# Altium PCB Soldering_Station.PcbDoc
Units mm, origin at the board's own origin, x right, y up, seen from the top; angles counter-clockwise.
Board outline 153.92 x 103.12 mm, 2 copper layers (Top Layer, Bottom Layer); 77 components, 76 nets, 294 pads, 68 vias.
Unrouted connection lines stored in the file: 1.
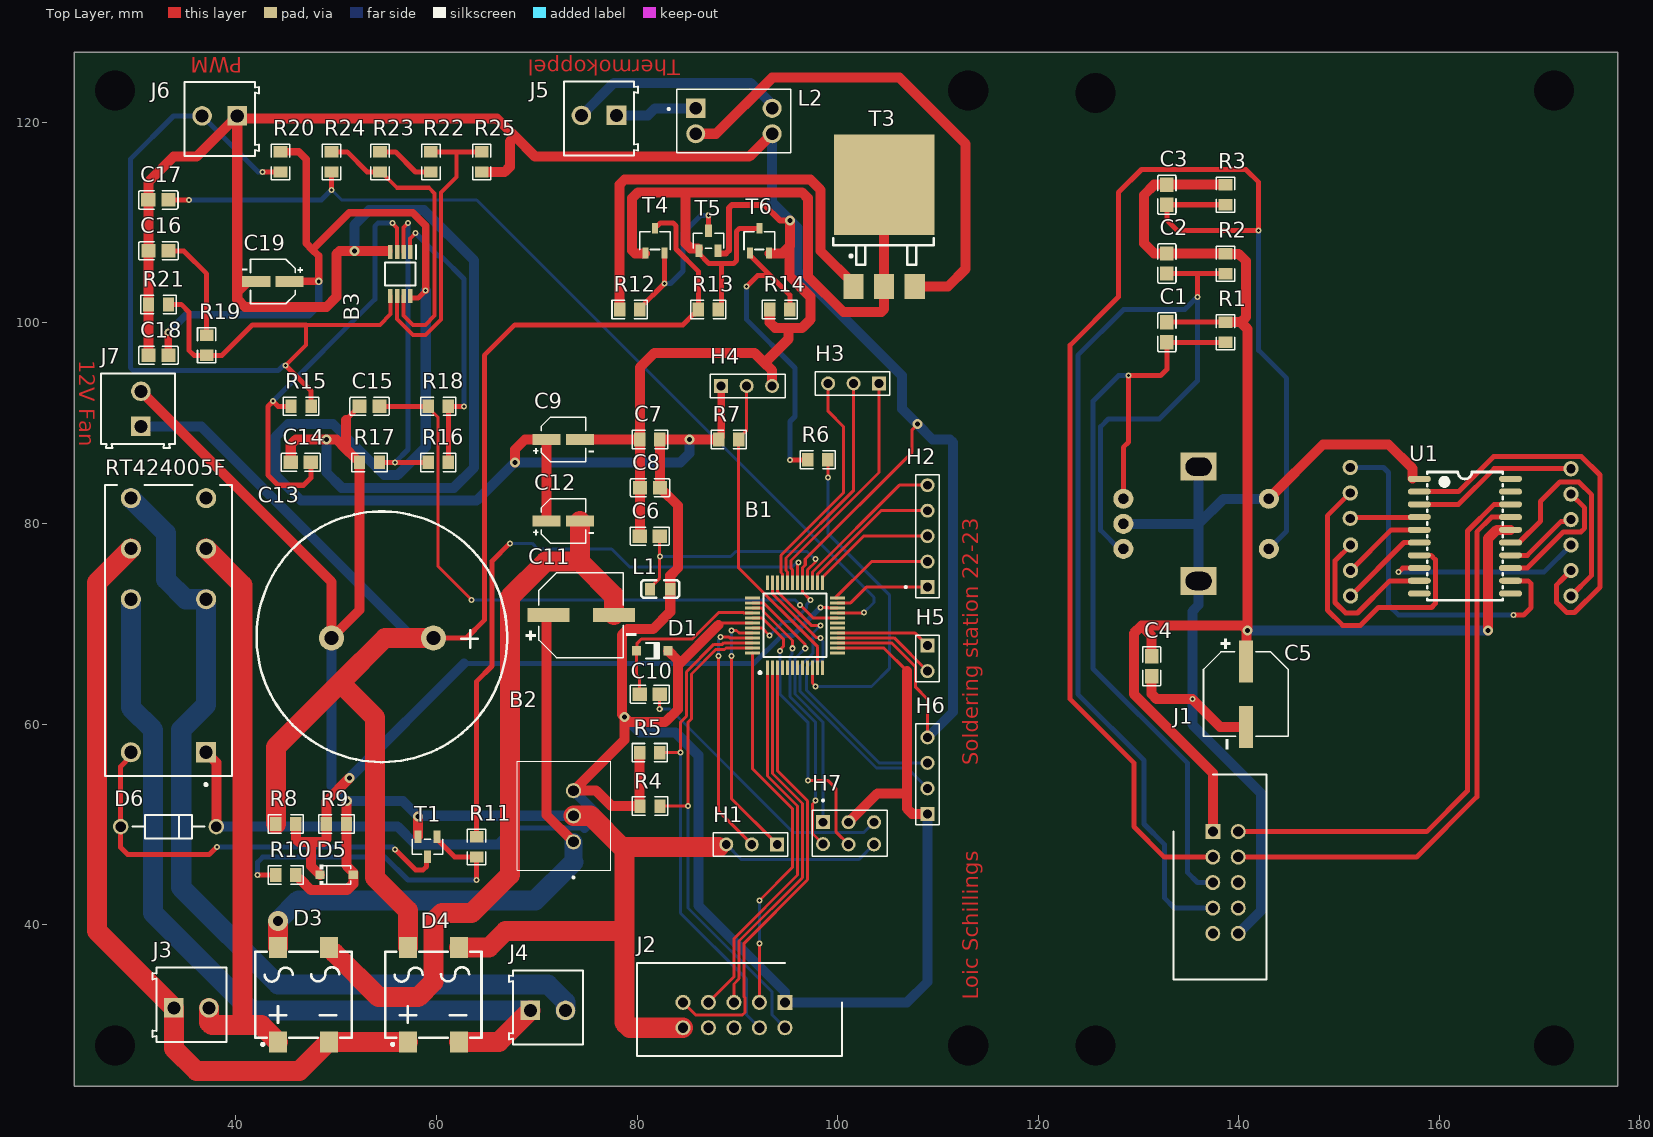
[diagram p0: Top Layer view]
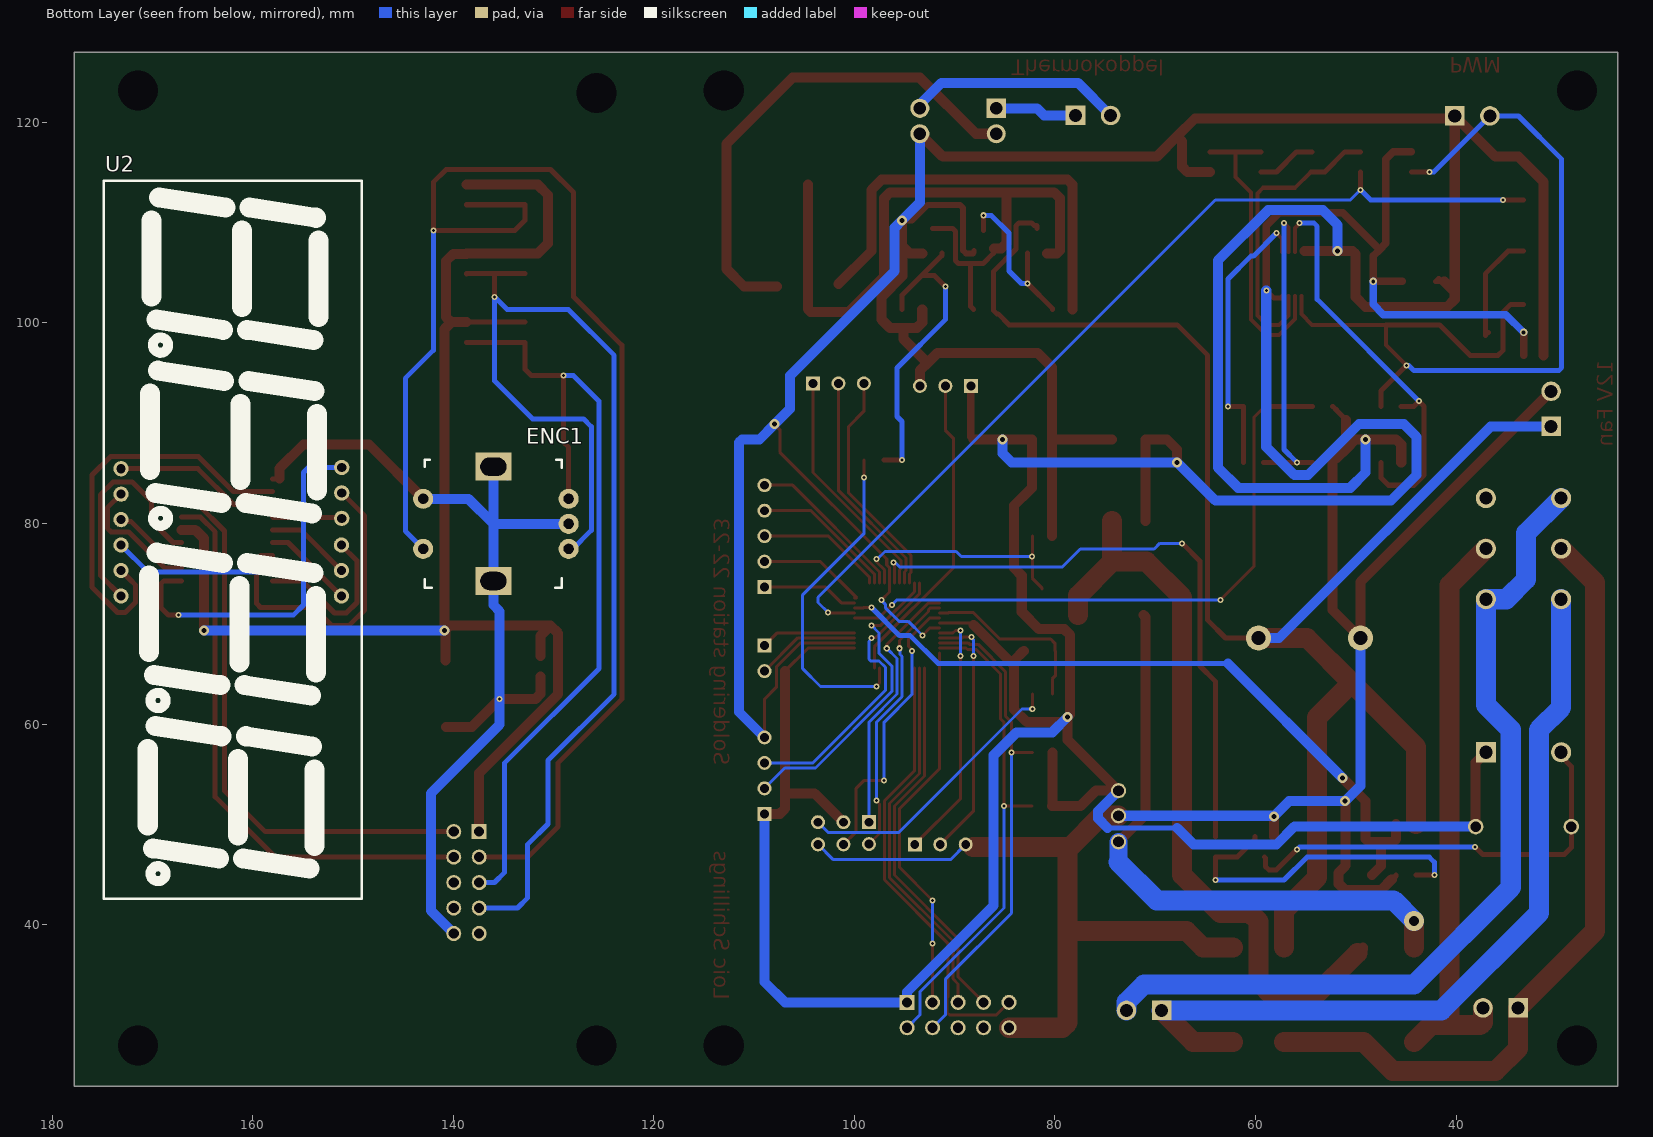
[diagram p1: Bottom Layer view, seen from below]

## Layer stack, top to bottom
Top Solder: solder mask 0.0102, Solder Resist, Dk 3.5
Top Layer: signal copper 0.0356
Dielectric 1: dielectric 0.32, FR-4, Dk 4.8
Bottom Layer: signal copper 0.0356
Bottom Solder: solder mask 0.0102, Solder Resist, Dk 3.5

## Board outline
23.876,23.876 177.8,23.876 177.8,127 23.876,127

## Design rules (kind name [scope] priority, off if disabled: settings)
Clearance [All] p1: gap=0.2 ignorepadtopadclearanceinfootprint=FALSE
HoleSize [All] p1: absolutevalues=TRUE maxlimit=5 minlimit=0.025 maxpercent=80.000 minpercent=20.000
MinimumSolderMaskSliver [All] p1: minsoldermaskwidth=0.25
PolygonConnect [All] p1: connectstyle=Relief reliefconductorwidth=0.254 reliefentries=4 polygonreliefangle="90 Angle" airgapwidth=0.254
RoutingVias [All] p1: holewidth=0.3 width=0.6 viastyle="Through Hole" minholewidth=0.3 minwidth=0.6 maxholewidth=1 maxwidth=2
SilkToSolderMaskClearance [IsPad] p1: minsilkscreentomaskgap=0.1 clearancetoexposedcopper=TRUE
SolderMaskExpansion [All] p1: expansion=0.102 istentingtop=FALSE
Width [All] p1: maxlimit=2 minlimit=0.3 preferedwidth=0.5
27 further rules are at their usual default settings.

## Classes and differential pairs
component class Voeding: B2 C12 C13 D3 D4 D5 D6 J3 J4 "Projects  Projects  Projects  Projects" R8 R9 R10 R11 T1
component class Thermokoppel: J5 L2 R12 R13 R14 T3 T4 T5 T6
component class PWM: B3 C14 C15 C16 C17 C18 C19 J6 R15 R16 R17 R18 R19 R20 R21 R22 R23 R24 R25
component class Display: C1 C2 C3 C4 ENC1 J1 R1 R2 R3 U1 U2
component class CPU: B1 C6 C7 C8 C9 C10 D1 H1 H2 H3 H4 H5 H6 H7 J2 L1 R4 R5 R6 R7

## Components (designator, comment, footprint, x,y, rotation, side; value= is the part's Value field where it differs from the comment)
B1 "ATMEGA4809-AU" ATMEGA4809-AU 95.758,69.85 r90 top
B2 "OKI-78SR-5_1.5-W36-C" OKI78SR515W36C 73.66,48.26 r90 top
B3 "MCP6002-E_MS" MCP6002-E_MS 56.388,104.902 r270 top
C1 "10nF" 10NF 132.842,99.076 r90 top
C2 "10nF" 10NF 132.842,105.934 r90 top
C3 "10nF" 10NF 132.842,112.792 r90 top
C4 "100nF" 10NF 131.318,65.77 r270 top
C5 "100uF" "100uF 50V" 140.716,62.992 r270 top
C6 "100nF" 10NF 81.264,78.74 r0 top
C7 "100nF" R0805 81.28,88.392 r0 top
C8 "100nF" 10NF 81.296,83.566 r0 top
C9 "10uF" 10UF 72.644,88.392 r0 top
C10 "100nF" 10NF 81.264,62.992 r180 top
C11 "100uF" "100uF 50V" 74.422,70.866 r0 top
C12 "10µF" 10UF 72.644,80.264 r0 top
C13 "4700µF" 4700UF 54.61,68.58 r180 top
C14 "10nF" 10NF 46.466,86.106 r0 top
C15 "10nF" 10NF 53.324,91.694 r0 top
C16 "10nF" 10NF 32.274,107.188 r0 top
C17 "10nF" 10NF 32.258,112.268 r0 top
C18 "100nF" 10NF 32.274,96.774 r0 top
C19 "10uF" 10UF 43.688,104.14 r180 top
D1 "1N4148W-7-F" 1N4148W 81.534,67.31 r0 top
D3 "TTR8MF" TTR8MF 46.736,33.02 r0 top
D4 "TTR8MF" TTR8MF 59.69,33.02 r0 top
D5 "BZT52C5V1_C353516" BZT52C5V1_C353516 50.038,44.958 r0 top
D6 "1N4007" "1N4007 THT" 33.274,49.784 r180 top
ENC1 "PEC11R-4220F-S0012" PEC11R-4220F-S0012 135.752,79.969 r90 bottom
H1 "3 Pin Header" "3 PIN HEADER" 88.9,48.006 r180 top
H2 "5 Pin Header" "5 PIN HEADER" 108.966,78.74 r90 top
H3 "3 Pin Header" "3 PIN HEADER" 99.06,93.98 r180 top
H4 "3 Pin Header" "3 PIN HEADER" 93.472,93.726 r0 top
H5 "Pin Header" "2 PIN HEADER" 113.132,61.087 r270 top
H6 "4 Pin Header" "4 PIN HEADER" 108.966,56.134 r90 top
H7 "6 Pin Header" "6 PIN HEADER" 103.632,50.216 r0 top
J1 "5104338-1" "10 PIN BOXHEADER" 137.414,49.276 r90 top
J2 "5104338-1" "10 PIN BOXHEADER" 94.742,32.258 r0 top
J3 "691214110002" "2 SCREW TERMINAL WE 691214110002" 35.56,32.004 r0 top
J4 "691214110002" "2 SCREW TERMINAL WE 691214110002" 71.12,31.75 r0 top
J5 "691214110002" "2 SCREW TERMINAL WE 691214110002" 76.2,120.396 r180 top
J6 "691214110002" "2 SCREW TERMINAL WE 691214110002" 38.382,120.35 r180 top
J7 "691214110002" "2 Screw Terminal WE 691214110002" 30.226,91.44 r90 top
L1 "10uH" "10UH INDUCT SMD" 82.312,73.469 r0 top
L2 "CM2545X171B-10" CM2545X171B-10 89.662,120.142 r0 top
R1 "10kΩ" R0805 138.684,99.076 r90 top
R2 "10kΩ" R0805 138.684,105.902 r90 top
R3 "10kΩ" R0805 138.684,112.792 r90 top
R4 "4k7" R0805 81.296,51.816 r180 top
R5 "4k7" R0805 81.264,57.15 r180 top
R6 "10k" R0805 98.028,86.36 r180 top
R7 "4k7" R0805 89.138,88.392 r0 top
R8 "68k" R0805 44.974,50.038 r180 top
R9 "10k" R0805 50.022,50.038 r0 top
R10 "4k7" R0805 44.974,44.958 r0 top
R11 "10k" R0805 64.008,47.752 r270 top
R12 "100" R0805 79.264,101.346 r0 top
R13 "4k7" R0805 87.106,101.346 r180 top
R14 "4k7" R0805 94.234,101.346 r0 top
R15 "5k6" R0805 46.498,91.694 r0 top
R16 "18k" R0805 60.182,86.106 r180 top
R17 "100" R0805 53.324,86.106 r0 top
R18 "5k6" R0805 60.182,91.694 r0 top
R19 "5k6" R0805 37.084,97.774 r270 top
R20 "1M" R0805 44.45,116.062 r90 top
R21 "10M" R0805 32.274,101.854 r0 top
R22 "18k" R0805 59.436,116.062 r90 top
R23 "18k" R0805 54.356,116.062 r90 top
R24 "5k6" R0805 49.53,116.062 r90 top
R25 "100" R0805 64.516,116.062 r90 top
RT424005F "RT424005" "RT424005-MFG Power Relay" 33.274,69.342 r90 top (schematic designator "Projects  Projects  Projects  Projects")
T1 "BC547" BC847C_NPN 59.116,47.768 r90 top
T3 "IRF9Z34NSPBF" IRF9Z34NSPBF 104.569,110.587 r0 top
T4 "BC847C_C3027113" BC847_PNP 81.788,108.204 r270 top
T5 "BC857 3G" BC847C_NPN 87.122,108.204 r270 top
T6 "BC847C_C3027113" BC847_PNP 92.202,108.204 r270 top
U1 "TM1637(TA2007)" TM1637(TA2007) 162.56,78.74 r270 top
U2 "ATA8041AB" ? 176.399,53.719 r270 bottom

## Footprints (in the part's own frame and the unit in brackets; to place one, negate y for a bottom-side part, rotate by r counter-clockwise, add the part's x,y. Pads: shape width x height; smd on the part's side, far side on the other; paste and mask are expansions set on the pad)
"1N4007 THT" [mm] "AXIAL, 2-Leads, Diameter 2.35mm"
  round 1.55 hole 1.05: 1(-4.77,0) 2(4.77,0)
  silkscreen extent -3.59,-1.17 3.59,1.17
1N4148W [mm] "SOD123, 2-Leads, Body 2.7x1.55mm, Height 1.45mm"
  rect 0.9x0.95 smd: 1(-1.575,0) 2(1.575,0)
  silkscreen extent -0.64,-0.82 0.64,0.77, body extent -1.35,-0.77 1.35,0.77, height 1.45
"2 PIN HEADER" [mil]
  rect 55x55 hole 35: 1(-265,-164)
  round 55 hole 35: 2(-165,-164)
  silkscreen extent -307,-210 -123,-118, body extent -313,-207 -116,-116, height 327
"2 SCREW TERMINAL WE 691214110002" [mm] "3.50 mm Horizontal Entry Modular, 2p"
  rect 1.95x1.95 hole 1.3: 1(-1.75,-0.3)
  round 1.95 hole 1.3: 2(1.75,-0.3)
  silkscreen extent -3.9,-3.7 3.5,3.7, body extent -3.95,-3.7 3.5,3.7, height 8.55
"2 Screw Terminal WE 691214110002" [mm] "3.50 mm Horizontal Entry Modular, 2p"
  rect 1.95x1.95 hole 1.3: 1(-1.75,-0.3)
  round 1.95 hole 1.3: 2(1.75,-0.3)
  silkscreen extent -3.9,-3.7 3.5,3.7, body extent -3.95,-3.7 3.5,3.7, height 8.55
"3 PIN HEADER" [mil]
  rect 55x55 hole 35: 1(-200,0)
  round 55 hole 35: 2(-100,0) 3(0,0)
  silkscreen extent -242,-46 51,46, body extent -242,-45 53,46, height 327
"4 PIN HEADER" [mil]
  rect 55x55 hole 35: 1(-200,0)
  round 55 hole 35: 2(-100,0) 3(0,0) 4(100,0)
  silkscreen extent -242,-46 154,46, body extent -241,-45 153,46, height 327
"5 PIN HEADER" [mil]
  rect 55x55 hole 35: 1(-200,0)
  round 55 hole 35: 2(-100,0) 3(0,0) 4(100,0) 5(200,0)
  silkscreen extent -242,-46 242,89, body extent -246,-45 246,46, height 327
"6 PIN HEADER" [mil]
  rect 55x55 hole 35: 1(-200,0)
  round 55 hole 35: 2(-100,0) 3(0,0) 4(-200,-86) 5(-100,-87) 6(0,-87)
  silkscreen extent -242,-134 51,89, body extent -241,-139 54,50, height 354
"10 PIN BOXHEADER" [mm]
  rect 1.5x1.5 / inner round 1.5 / far side rect 1.5x1.5 hole 1: 1(0,0)
  round 1.5 hole 1: 2(0,-2.54) 3(-2.54,0) 4(-2.54,-2.54) 5(-5.08,0) 6(-5.08,-2.54) 7(-7.62,0) 8(-7.62,-2.54) 9(-10.16,0) 10(-10.16,-2.54)
  silkscreen extent -14.73,-5.33 5.71,3.94, body extent -10,-3.38 10,3.38, height 5.8
10NF [mm]
  rect 1.41x1.35 smd: 1(-1,0) 2(1,0)
  silkscreen extent -1.96,-0.9 1.96,0.9
10UF [mm]
  rect 2.8x1.1 smd: 1(-1.66,0) 2(1.66,0)
  silkscreen extent -2.99,-2.23 3.05,2.23
"10UH INDUCT SMD" [mm]
  rect 1x1.25 smd: 1(-1,0) 2(1,0)
  silkscreen extent -1.91,-0.89 1.91,0.89
"100uF 50V" [mm]
  rect 4.2x1.4 smd: 1(-3.267,0) 2(3.267,0)
  silkscreen extent -5.52,-4.23 5.48,4.23
4700UF [mm]
  round 2.5 hole 1.4: 1(-5.08,0) 2(5.08,0)
  silkscreen extent -12.44,-12.62 12.56,12.37
ATMEGA4809-AU [mm]
  rect 1.475x0.3 smd: 1(-4.238,2.75) 2(-4.238,2.25) 3(-4.238,1.75) 4(-4.238,1.25) 5(-4.238,0.75) 6(-4.238,0.25) 7(-4.238,-0.25) 8(-4.238,-0.75) 9(-4.238,-1.25) 10(-4.238,-1.75) 11(-4.238,-2.25) 12(-4.238,-2.75) 25(4.238,-2.75) 26(4.238,-2.25) 27(4.238,-1.75) 28(4.238,-1.25) 29(4.238,-0.75) 30(4.238,-0.25) 31(4.238,0.25) 32(4.238,0.75) 33(4.238,1.25) 34(4.238,1.75) 35(4.238,2.25) 36(4.238,2.75)
  rect 0.3x1.475 smd: 13(-2.75,-4.238) 14(-2.25,-4.238) 15(-1.75,-4.238) 16(-1.25,-4.238) 17(-0.75,-4.238) 18(-0.25,-4.238) 19(0.25,-4.238) 20(0.75,-4.238) 21(1.25,-4.238) 22(1.75,-4.238) 23(2.25,-4.238) 24(2.75,-4.238) 37(2.75,4.238) 38(2.25,4.238) 39(1.75,4.238) 40(1.25,4.238) 41(0.75,4.238) 42(0.25,4.238) 43(-0.25,4.238) 44(-0.75,4.238) 45(-1.25,4.238) 46(-1.75,4.238) 47(-2.25,4.238) 48(-2.75,4.238)
  silkscreen extent -4.85,-3.15 3.15,3.62, body extent -9.98,-3.38 10.02,3.38, height 5.8
BC847_PNP [mm]
  rect 1.07x0.6 smd: 1(1.235,-0.95) 2(1.235,0.95) 3(-1.235,0)
  silkscreen extent -0.88,-1.54 0.88,1.54
BC847C_NPN [mm]
  rect 1.25x0.7 smd: 1(1,-0.95) 2(1,0.95) 3(-1,0)
  silkscreen extent -0.73,-1.53 0.74,1.53
BZT52C5V1_C353516 [mm]
  rect 0.91x0.84 smd: 1(-1.655,0) 2(1.655,0)
  silkscreen extent -1.65,-1 1.43,1
CM2545X171B-10 [mm]
  rect 1.905x1.905 hole 1.27: 1(-3.81,1.27)
  round 1.905 hole 1.27: 2(-3.81,-1.27) 3(3.81,-1.27) 4(3.81,1.27)
  silkscreen extent -6.6,-3.15 5.69,3.15, body extent -5.69,-3.15 5.69,3.15, height 9.5
IRF9Z34NSPBF [mm]
  rect 2x2.5 smd: 1(-2.969,-6.955) 2(0.079,-6.955) 3(3.127,-6.955)
  rect 10x10 smd: 2(0.079,3.205)
  silkscreen extent -5,-4.79 5,-2.13
MCP6002-E_MS [mm]
  rect 1.4x0.45 smd: 1(-2.2,0.975) 2(-2.2,0.325) 3(-2.2,-0.325) 4(-2.2,-0.975) 5(2.2,-0.975) 6(2.2,-0.325) 7(2.2,0.325) 8(2.2,0.975)
  silkscreen extent -2.9,-1.5 1.15,1.55
OKI78SR515W36C [mm]
  round 1.519 hole 1.08: 1(0,0) 2(2.6,0) 3(5.1,0)
  silkscreen extent -3.6,-3.7 8.05,5.6, body extent -7.32,-3.2 12.68,3.55, height 5.8
PEC11R-4220F-S0012 [mm]
  round 2 hole 1 slot 1.005 at 0 deg: 1(-2.499,7.25) 2(2.499,7.25) A(-2.499,-7.25) B(2.499,-7.25) C(0,-7.25)
  rect 2.8x3.6 hole 1.8 slot 2.6 at 90 deg: 3(-5.7,0.249) 3(5.7,0.249)
  silkscreen extent -6.38,-6.57 6.38,7.08
R0805 [mm]
  rect 1.133x1.377 smd: 1(-1,0) 2(1,0)
  silkscreen extent -1.76,-0.92 1.76,0.92
"RT424005-MFG Power Relay" [mm]
  round 2 hole 1.3 paste-1000 mask+0: 11(8.15,-3.75) 12(3.11,-3.75) 14(13.19,-3.75) 21(8.15,3.75) 22(3.11,3.75) 24(13.19,3.75) A2(-12.15,3.75)
  rect 2x2 hole 1.3 paste-1000 mask+0: A1(-12.15,-3.75)
  silkscreen extent -15.5,-6.35 14.5,6.35, body extent -14.6,-6.45 14.6,6.45, height 0.25
TM1637(TA2007) [mm]
  oval 0.6x2.3 smd: 1(-5.715,-4.55) 2(-4.445,-4.55) 3(-3.175,-4.55) 4(-1.905,-4.55) 5(-0.635,-4.55) 6(0.635,-4.55) 7(1.905,-4.55) 8(3.175,-4.55) 9(4.445,-4.55) 10(5.715,-4.55) 11(5.715,4.55) 12(4.445,4.55) 13(3.175,4.55) 14(1.905,4.55) 15(0.635,4.55) 16(-0.635,4.55) 17(-1.905,4.55) 18(-3.175,4.55) 19(-4.445,4.55) 20(-5.715,4.55)
  silkscreen extent -6.4,-3.75 6.4,3.75
TTR8MF [mm]
  rect 1.8x2.1 smd: 1(-2.55,-4.7) 2(2.55,-4.7) 3(2.55,4.7) 4(-2.55,4.7)
  silkscreen extent -4.8,-5.08 4.8,4.3
? [mil]
  round 60 hole 36: 2(-1255.07,994.83) 2(-1250.07,128.69) 3(-1155.07,994.83) 3(-1150.07,128.69) 4(-1055.07,994.83) 5(-950.07,128.69) 6(-850.07,128.69) 8(-750.07,128.69) 9(-1050.07,128.69) 9(-950.07,993.69) 10(-850.07,993.69) 11(-750.07,993.69)
  silkscreen extent -2380,61 439,1073

## Part data
B1: "8-bit Microcontrollers - MCU 20MHz, 48KB, TQFP", Manufacturer_Name=Microchip, Mouser Part Number=556-ATMEGA4809-AU, Geometry.Height=1.2mm, Manufacturer_Part_Number=ATMEGA4809-AU, Mouser Price/Stock=https://www.mouser.co.uk/ProductDetail/Microchip-Technology-Atmel/ATMEGA4809-AU?qs=P1JMDcb91o4zLIorxO9tIg%3D%3D
B2: "Non-Isolated DC/DC Converters 7.5W 24Vin 5Vout1 1.5A SIP Non-Iso", Manufacturer_Name="Murata Electronics", Manufacturer_Part_Number=OKI-78SR-5/1.5-W36-C, Mouser Part Number=580-OKI78SR5/1.5W36C, Datasheet Link=https://www.murata.com/products/productdata/8807037992990/oki-78sr.pdf?1583754815000, Geometry.Height=16.5mm, Mouser Price/Stock=https://www.mouser.co.uk/ProductDetail/Murata-Power-Solutions/OKI-78SR-5-1.5-W36-C?qs=uJpRT2lXVNXJP%252Bo08dQqJQ%3D%3D
B3: "OP Amp Dual GP R-R I/O 6V", Manufacturer_Name=Microchip, Manufacturer_Part_Number=MCP6002-E/MS, Mouser Part Number=579-MCP6002-E/MS, Datasheet Link=https://datasheet.datasheetarchive.com/originals/distributors/Datasheets-304/55313.pdf, Geometry.Height=1.1mm, Mouser Price/Stock=https://www.mouser.co.uk/ProductDetail/Microchip-Technology-Atmel/MCP6002-E-MS?qs=huzeVNXgovXv0kPjGdVLUA%3D%3D
C1 C2 C3 C14 C15 C16 C17: BOM_JLCPCB Part Class="Extended Part", BOM_Manufacturer=CCTC(三环), BOM_Manufacturer Part=TCC0805X7R103M500DT, BOM_Supplier=LCSC, BOM_Supplier Part=C376921, Contributor=LCSC, nameAlias=Capacitance, spicePre=C, spiceSymbolName=TCC0805X7R103M500DT
C4 C6 C7 C8 C10 C18: library part 10nF, BOM_JLCPCB Part Class="Extended Part", BOM_Manufacturer=CCTC(三环), BOM_Manufacturer Part=TCC0805X7R103M500DT, BOM_Supplier=LCSC, BOM_Supplier Part=C376921, Contributor=LCSC, nameAlias=Capacitance, spicePre=C, spiceSymbolName=TCC0805X7R103M500DT
C5 C11: library part 100uF_50V, BOM_JLCPCB Part Class="Extended Part", BOM_Manufacturer=Nichicon(尼吉康), BOM_Manufacturer Part=UWT1H101MNL1GS, BOM_Supplier=LCSC, BOM_Supplier Part=C445063, Contributor=LCSC, nameAlias=Capacitance, spicePre=C, spiceSymbolName=UWT1H101MNL1GS
C9 C19: BOM_JLCPCB Part Class="Extended Part", BOM_Manufacturer=ST(先科), BOM_Manufacturer Part=CS1E100M-CRC54, BOM_Supplier=LCSC, BOM_Supplier Part=C98750, Contributor=LCSC, nameAlias=Capacitance, spicePre=C, spiceSymbolName=CS1E100M-CRC54
C12 C13: library part 10uF, BOM_JLCPCB Part Class="Extended Part", BOM_Manufacturer=ST(先科), BOM_Manufacturer Part=CS1E100M-CRC54, BOM_Supplier=LCSC, BOM_Supplier Part=C98750, Contributor=LCSC, nameAlias=Capacitance, spicePre=C, spiceSymbolName=CS1E100M-CRC54
D1: library part 1N4148W, "Fast Switching Diode, 100 V, 0.15 A, -65 to 150 degC, 2-Pin?SOD123, RoHS, Tape and Reel", If - Forward Current=0.15A, Ir - Reverse Current=1uA, Manufacturer=DiodesIncorporated, Max Surge Current=2A, Maximum Operating Temperature=+150C, Minimum Operating Temperature=-65C, Operating Temperature Range=-65Cto+150C, Package / Case=SOD-123, Package Reference=SOD123-2, Peak Reverse Voltage=100V, Vf - Forward Voltage=1.25V, Brand=DiodesIncorporated, Configuration=Single, Datasheet URL=http://www.farnell.com/datasheets/1915529.pdf, Datasheet Version="Rev. 24-2, 10/2013", Factory Pack Quantity=3000, Height=1.25mm, Length=2.85mm, Manufacturer URL=http://www.diodes.com/, Mounting Style=SMD/SMT, Package URL=http://www.diodes.com/datasheets/ds18004.pdf, Packaging=Reel, Product=SwitchingDiodes, Product Category=Diodes-GeneralPurpose,Power,Switching, Recovery Time=4ns, RoHS=True, Series=1N4148, Type=SwitchingDiode, Unit Weight=0.000353oz, Width=1.7mm
D3 D4: BOM_JLCPCB Part Class="Extended Part", BOM_Manufacturer=MDD, BOM_Manufacturer Part=TTR8MF, BOM_Supplier=LCSC, BOM_Supplier Part=C712546, Contributor=LCSC, spicePre=D, spiceSymbolName=TTR8MF
D5: BOM_JLCPCB Part Class="Extended Part", BOM_Manufacturer=晶导微电子, BOM_Manufacturer Part=BZT52C5V1, BOM_Supplier=LCSC, BOM_Supplier Part=C353516, Contributor=LCSC, spicePre=D, spiceSymbolName=BZT52C5V1_C353516
D6: library part "1N4007 THT", "Standard Recovery Rectifier, 2-Pin Axial_Lead, Pb-Free, Bulk Bag", Manufacturer="On Semiconductor", ComponentLink1Description="Manufacturer URL", ComponentLink1URL=http://www.onsemi.com/, ComponentLink2Description=Datasheet, ComponentLink2URL=http://www.onsemi.com/pub_link/Collateral/1N4001-D.PDF, ComponentLink3Description="Package Specification", ComponentLink3URL=http://www.onsemi.cn/pub_link/Collateral/59-10.PDF, DatasheetVersion="Rev. 13", IFSM Max (A)=30, IO(rec) Max (A)=1, Mounting Technology="Through Hole", PackageDescription="2-Pin, Axial Lead, Diameter 2.35 mm", PackageReference=AXIAL_LEAD-2-59-10, PackageVersion="Rev. U, 02/2005", Packing="Bulk Bag", PartNumber=1N4007, RoHS=TRUE, Type="Standard Recovery", VRRM Max (V)=1000
ENC1: BOM_JLCPCB Part Class="Extended Part", BOM_Manufacturer=BOURNS, BOM_Manufacturer Part=PEC11R-4220F-S0012, BOM_Supplier=LCSC, BOM_Supplier Part=C143817, Contributor=LCSC, spicePre=S, spiceSymbolName=PEC11R-4220F-S0012
H5: library part "2 Pin Header", "Connector Terminal Blocks Receptacle 2 Position 5.08mm Solder Straight Thru-Hole 13.5A/Contact", Package=None, Availability="In Stock", Check_prices=https://www.snapeda.com/parts/282837-2/TE+Connectivity+AMP+Connectors/view-part/?ref=eda, MF="TE Connectivity", MP=282837-2, Price=None, Purchase-URL=https://pricing.snapeda.com/search/part/282837-2/?ref=eda, SnapEDA_Link=https://www.snapeda.com/parts/282837-2/TE+Connectivity+AMP+Connectors/view-part/?ref=snap
J1 J2: library part "10 Pin Boxheader", "Header vert 10 way 2.54mm AmpLatch", Manufacturer_Name="TE Connectivity", Mouser Part Number=571-5104338-1, Datasheet Link=https://www.te.com/commerce/DocumentDelivery/DDEController?Action=showdoc&DocId=Customer+Drawing%7F5104338%7FE%7Fpdf%7FEnglish%7FENG_CD_5104338_E.pdf%7F5104338-1, Geometry.Height=9.855mm, Manufacturer_Part_Number=5104338-1, Mouser Price/Stock=https://www.mouser.co.uk/ProductDetail/TE-Connectivity/5104338-1?qs=84A%2FDAdkstJBRnv2z9usOA%3D%3D
J3 J4 J5 J6 J7: library part "2 Screw Terminal WE 691214110002", "Serie 2141 - 3.50 mm Horizontal Entry Modular with Rising Cage Clamp WR-TBL, 2 pin", Manufacturer="Wurth Elektronik", Operating Temperature=-40to105degC, Datasheet URL=http://katalog.we-online.de/em/datasheet/6912141100xx.pdf, Manufacturer URL=http://www.we-online.de, Mounting Technology=THT, Package Reference=691214110002, Packaging=Box, Part Number=691214110002, Pin Number=2, Pitch=3.50mm, Publisher=WurthElektronik
L1: BOM_JLCPCB Part Class="Extended Part", BOM_Manufacturer=KOHERelec(科或), BOM_Manufacturer Part=PMI201214S-100M, BOM_Supplier=LCSC, BOM_Supplier Part=C2922559, Contributor=LCSC, nameAlias=Inductance, spicePre=L, spiceSymbolName=PMI201214S-100M
L2: "2 Line Common Mode Choke Through Hole 170 Ohms @ 100 MHz 10A DCR 10mOhm", Package="Vertical-4 Laird", Availability="In Stock", Check_prices=https://www.snapeda.com/parts/CM2545X171B-10/Laird/view-part/?ref=eda, MF=Laird, MP=CM2545X171B-10, Price=None, Purchase-URL=https://pricing.snapeda.com/search/part/CM2545X171B-10/?ref=eda, SnapEDA_Link=https://www.snapeda.com/parts/CM2545X171B-10/Laird/view-part/?ref=snap
R1 R2 R3: BOM_JLCPCB Part Class="Basic Part", BOM_Manufacturer=UNI-ROYAL(厚声), BOM_Manufacturer Part=0805W8F1002T5E, Resistance (Ohms)=10K, BOM_Supplier=LCSC, BOM_Supplier Part=C17414, nameAlias=Resistance, spicePre=R, spiceSymbolName=0805W8F1002T5E
R4 R5 R6 R7 R8 R9 R10 R11 R12 R13 R14 R15 R16 R17 R18 R19 R20 R21 R22 R23 R24 R25: library part Resistor, Manufacturer="Vishay Dale", Part Number=CRCW08050000Z0EA
RT424005F: library part CMP-03395-000087-1, "RELAY GENERAL PURPOSE DPDT 8A 5V", Ambient Temperature Range High=+85°C, Ambient Temperature Range Low=-40°C, Coil Power=403mW, Coil Resistance=62Ω, Coil Voltage=5V, Current Rating=8A, Manufacturer="TE Connectivity", Automotive=No, Category=Relay, Coil Type=Non-Latching, ComponentLink2Description=Datasheet, ComponentLink2URL=https://www.te.com/commerce/DocumentDelivery/DDEController?Action=showdoc&DocId=Data+Sheet%7FRT2%7F1014%7Fpdf%7FEnglish%7FENG_DS_RT2_1014.pdf%7F5-1393243-9, Device Class L1=Electromechanical, Device Class L2=Relays, Device Class L3="Power Relays", Digikey Description="RELAY GENERAL PURPOSE DPDT 8A 5V", Height=15.7mm, Lead Free=Yes, Manufacturer Part Number=RT424005, Mouser Description="General Purpose Relay, Rt2 Series, Power, Non Latching, Dpdt, 5 Vdc, 8 A Rohs Compliant: Yes", Number Of Contacts=2, Octopart=https://octopart.com/5-1393243-9-te+connectivity-41835766, Package=RT424005, RoHS=TRUE, Throw Configuration=DPDT
T1 T4 T6: library part BC847C_NPN, BOM_JLCPCB Part Class="Extended Part", BOM_Manufacturer=SALLTECH(萨瑞), BOM_Manufacturer Part=BC847C, BOM_Supplier=LCSC, BOM_Supplier Part=C3027113, Contributor=lcsc, link=https://atta.szlcsc.com/upload/public/pdf/source/20220824/287706FC7904CA05889B348536529CCD.pdf, spicePre=Q, spiceSymbolName=BC847C_C3027113
T5: library part BC847_PNP, BOM_JLCPCB Part Class="Extended Part", BOM_Manufacturer=CJ(江苏长电/长晶), BOM_Manufacturer Part=BC857, BOM_Supplier=LCSC, BOM_Supplier Part=C2139, spicePre=Q, spiceSymbolName="BC857 3G"
U1: BOM_JLCPCB Part Class="Extended Part", BOM_Manufacturer=TM(天微), BOM_Manufacturer Part=TM1637(TA2007), BOM_Supplier=LCSC, BOM_Supplier Part=C5337160, Contributor=lcsc, spicePre=U, spiceSymbolName=TM1637(TA2007)

## Free pads (board coordinates)
  round 1.524 hole 4: H1(27.94,123.19) H2(113.03,123.19) H3(27.94,27.94) H4(113.03,27.94) H5(125.73,122.936) H6(171.45,123.19) H7(125.73,27.94) H8(171.45,27.94)

## Via types
v1: diameter 0.6, hole 0.3, Top Layer to Bottom Layer, 53 vias
v2: diameter 1, hole 0.5, Top Layer to Bottom Layer, 12 vias
v3: diameter 0.75, hole 0.375, Top Layer to Bottom Layer, 2 vias
v4: diameter 2, hole 1, Top Layer to Bottom Layer, 1 vias

## Nets (pads, with @x,y where several pads share a name; then routed paths per layer and width w, separated by ;. In a path a pad name is that pad's centre, name@x,y a point inside that pad or via, vN(x,y) a via of type N, cw(c..) or ccw(c..) an arc to the next point about the centre after c; other vN are vias at no path point)
5V: B1.14 B1.42 B2.3 B3.8 C7.2 C8.2 C9.1 C12.1 C18.2 C19.1 D1.2 D6.1 H4.1 H6.1 H7.2 J2.1 L1.2 R4.2 R5.2 R7.1 R20.2 RT424005F.A1 | length 395.9
  Top Layer w0.3: R4.2@80.264,51.848 R4.2 ; 88.1,69.88 88.32,70.1 B1.42 ; R7.1 R7.1@88.392,88.646 ; B1.14 104.612,67.6 106.934,65.278
  Top Layer w0.4: B3.8 57.363,102.502 B3.8@57.388,102.477
  Top Layer w0.5: B3.8@57.388,102.477 58.163,102.477 v1(58.928,103.242)
  Top Layer w0.75: C18.2 v3(33.274,99.06) ; R20.2 46.26,117.062 46.99,116.332 46.99,107.95 47.625,107.315 ; C19.1 v3(48.26,104.14) 48.26,106.68 47.625,107.315 ; v1(58.928,103.242) 58.928,109.689 57.619,110.998 51.308,110.998 47.625,107.315 ; R7.1@88.392,88.646 H4.1
  Top Layer w1: RT424005F.A1 38.044,56.172 D6.1 ; v2(67.818,86.106) 67.818,87.376 68.834,88.392 C9.1 C12.1 ; R4.2@80.264,51.848 R5.2 ; R4.2 77.47,51.816 75.926,53.36 B2.3 78.74,58.44 v2(78.74,60.706) ; C8.2@82.28,83.582 C7.2 v2(85.209,88.392) R7.1 ; C8.2 82.326,83.566 82.501,83.391 82.501,83.361 84.074,81.788 84.074,75.563 83.312,74.801 L1.2 83.312,71.198 81.58,69.466 79.072,69.466 78.486,68.88 78.486,60.96 v2(78.74,60.706) ; D1.2 84.074,66.345 84.074,65.854 ; 88.1,69.88 84.074,65.854 ; H7.2 103.962,53.086 106.934,53.086 ; 106.934,65.278 106.934,53.086 ; H6.1 107.442,51.054 106.934,51.562 106.934,53.086 ; v2(78.74,60.706) 79.248,60.198 82.804,60.198 84.074,61.468 84.074,65.854
  Bottom Layer w0.5: 67.812,49.651 74.758,49.651
  Bottom Layer w0.75: v3(33.274,99.06) 35.052,100.838 47.244,100.838 48.26,101.854 v3(48.26,104.14)
  Bottom Layer w1: D6.1 56.134,49.784 57.912,48.006 66.167,48.006 67.812,49.651 ; v1(58.928,103.242) 58.928,87.63 56.134,84.836 54.771,84.836 49.691,89.916 45.212,89.916 43.942,88.646 43.942,84.836 46.482,82.296 64.008,82.296 v2(67.818,86.106) 84.328,86.106 85.209,86.987 v2(85.209,88.392) ; B2.3 75.692,51.328 75.692,50.585 74.758,49.651 ; v2(78.74,60.706) 80.264,59.182 83.82,59.182 86.106,56.896 86.106,41.91 94.742,33.274 J2.1 106.934,32.258 108.966,34.29 H6.1
GND: B1.15 B1.29 B1.43 B2.2 B3.4 C4.2 C5.2 C6.1 C7.1 C8.1 C9.2 C13.2 C14.1 C15.1 C16.1 C17.1 C18.1 C19.2 D4.3 D5.2 ENC1.2 ENC1.3 ENC1.C H1.3 H4.3 H6.4 H7.6 J1.10 J2.10 J6.1 J7.2 L2.3 R9.2 R10.2 R14.1 R17.1 R21.1 R25.1 T1.2 T5.2 T6.2 U1.1 | length 677.7
  Top Layer w0.3: C6.1 C6.1@80.296,78.772 ; C8.1@80.28,83.582 C8.1 ; B1.43 92.452,69.6 v1(93.218,68.834) ; v1(97.282,72.39) 96.508,73.164 B1.29 96.508,75.592 96.774,75.858 96.774,76.454 107.442,87.122 107.442,89.363 107.95,89.871 v2(107.95,89.916) ; B1.15 105.382,68.1 107.784,65.698 107.784,63.666 108.966,62.484 H6.4
  Top Layer w0.5: C17.1 C17.1@31.266,112.26 ; C16.1@31.266,107.196 C16.1 ; C19.2@41.178,104.14 C19.2 C19.2@41.728,104.44 ; R10.2 45.974,44.836 46.29,44.519 R10.2@46.413,44.519 ; 50.962,90.332 51.869,91.239 51.869,91.269 52.294,91.694 C15.1 ; v2@51.022,52.292 v2(51.054,52.324) ; D5.2@51.701,45.087 51.742,45.128 D5.2@51.742,45.163 ; R17.1@51.885,86.545 52.008,86.545 52.324,86.228 R17.1 ; T5.2 88.072,107.034 T5.2@88.172,106.934 ; 88.159,47.752 88.241,47.834 88.728,47.834 H1.3 ; T6.2 T6.2@93.187,106.934 ; U1.1@157.319,84.501 157.365,84.455 U1.1
  Top Layer w0.6: T5.2@88.172,106.934 88.861,106.934 89.154,107.227 89.154,111.467 89.447,111.76 92.71,111.76 94.234,110.236 v2(95.25,110.236)
  Top Layer w1: J7.2 49.53,74.186 C13.2 52.324,71.374 R17.1 ; C17.1 31.258,114.062 33.782,116.586 36.068,116.586 J6.1 ; C16.1@31.266,107.196 C17.1@31.266,112.26 ; C18.1 R21.1 C16.1 ; C19.2@41.178,104.14 40.132,103.095 ; C14.1 45.466,87.884 45.974,88.392 v2(49.022,88.392) 50.038,88.392 50.962,87.468 ; R10.2@46.413,44.519 47.498,43.434 51.054,43.434 51.701,44.081 D5.2@51.701,45.087 ; 50.962,90.332 50.962,87.468 ; v2@51.022,52.292 R9.2 51.022,45.883 D5.2@51.742,45.163 ; R17.1@51.885,86.545 50.962,87.468 ; 55.118,107.188 v2(51.816,107.188) 50.331,107.188 50.038,106.895 50.038,102.616 49.022,101.6 40.894,101.6 40.132,102.362 40.132,103.095 ; T1.2 v2(58.166,50.8) ; R25.1 66.802,115.062 67.31,115.57 67.31,118.11 67.818,118.618 ; C9.2 C7.1 ; C8.1@80.28,83.582 C7.1 ; C6.1@80.296,78.772 C8.1 ; T6.2@93.187,106.934 94.488,106.934 95.208,107.654 ; R14.1 93.234,100.06 93.773,99.521 95.123,99.521 ; H4.3 93.472,95.25 92.583,96.139 ; L2.3 91.186,116.586 69.85,116.586 67.818,118.618 ; v2(95.25,110.236) 95.25,107.696 95.208,107.654 ; C4.2 131.318,62.992 131.826,62.484 v1(135.382,62.484) 138.141,59.725 C5.2 ; ENC1.2 148.417,87.884 154.94,87.884 157.319,85.505 U1.1@157.319,84.501 ; 40.132,103.095 J6.1 ; J6.1 40.386,120.396 66.04,120.396 67.818,118.618 ; C7.1 80.28,95.563 81.745,97.028 91.694,97.028 92.583,96.139 ; 92.583,96.139 92.837,96.139 95.123,98.425 95.123,99.521 ; 95.123,99.521 96.473,99.521 97.282,100.33 97.282,102.616 95.208,104.69 95.208,107.654
  Top Layer w2: D4.3 65.24,37.72 66.89,39.37 78.74,39.37 ; B2.2 75.378,50.86 78.486,47.752 88.159,47.752 ; 78.74,47.752 78.74,39.37 ; J2.10 79.248,29.718 78.74,30.226 78.74,39.37
  Bottom Layer w0.3: H1.3 90.424,46.482 102.108,46.482 H7.6 ; v1(93.218,68.834) 94.636,70.252 95.555,70.252 96.916,71.613 96.916,71.943 97.282,72.309 v1(97.282,72.39)
  Bottom Layer w0.5: ENC1.3@134.612,84.519 135.762,85.669 ENC1.3@136,85.669 ; ENC1.3@135.382,74.149 ENC1.3@135.503,74.27
  Bottom Layer w1: v2(49.022,88.392) 49.022,85.09 50.546,83.566 61.722,83.566 63.754,85.598 63.754,106.234 58.736,111.252 53.278,111.252 51.816,109.79 v2(51.816,107.188) ; C13.2 49.53,53.848 v2(51.054,52.324) 56.642,52.324 v2(58.166,50.8) 58.226,50.86 B2.2 ; L2.3 93.472,112.014 v2(95.25,110.236) 95.985,109.501 95.985,105.183 106.426,94.742 106.426,91.44 v2(107.95,89.916) 109.474,88.392 111.213,88.392 111.506,88.099 111.506,61.214 H6.4 ; ENC1.C 136,79.969 ; ENC1.3@136,85.669 136,79.969 ; J1.10 142.24,41.402 142.24,53.086 135.382,59.944 v1(135.382,62.484) 135.382,71.247 136,71.865 136,74.27 136,79.969 ; ENC1.2 138.5,82.469 136,79.969
NetB1_1: B1.1 J2.7 | length 38.3
  Top Layer w0.3: J2.7 89.662,34.798 89.662,38.608 96.004,44.95 96.004,51.824 93.008,54.82 B1.1
NetB1_2: B1.2 J2.5 | length 37.4
  Top Layer w0.3: J2.5 89.662,34.091 90.178,34.607 90.178,38.362 96.504,44.688 96.504,52.086 93.508,55.082 B1.2
NetB1_3: B1.3 J2.9 | length 45.1
  Top Layer w0.3: J2.9 85.852,30.988 90.502,30.988 90.762,31.248 90.762,32.714 90.678,32.798 90.678,38.155 97.004,44.48 97.004,52.348 94.008,55.344 B1.3
NetB1_10: B1.10 R6.1 | length 33.4
  Top Layer w0.3: B1.10 97.508,64.08 97.79,63.798 v1(97.79,63.754) ; v1(99.028,84.614) R6.1
  Bottom Layer w0.3: v1(97.79,63.754) 103.378,63.754 105.156,65.532 105.156,72.898 99.028,79.026 v1(99.028,84.614)
NetB1_11: B1.11 H4.2 R7.2 | length 31.7
  Top Layer w0.3: H4.2 90.932,89.308 90.138,88.514 R7.2 90.138,75.575 98.008,67.706 B1.11
NetB1_14: C1.2 C2.2 C3.2 C4.1 C5.1 J1.1 R1.2 R2.2 R3.2 U1.16 | length 146.2
  Top Layer w0.5: C1.2 R1.2 ; C2.2 C2.2@132.858,106.918 ; R2.2@138.668,106.918 R2.2 ; C5.1 C5.1@140.79,66.333 ; v2@140.79,69.268 v2(140.863,69.342)
  Top Layer w1: C4.1 131.318,68.795 130.302,69.811 ; C2.2 131.572,106.934 130.556,107.95 130.556,112.776 131.572,113.792 C3.2 R3.2 ; C2.2@132.858,106.918 R2.2@138.668,106.918 ; J1.1 137.414,55.118 129.54,62.992 129.54,69.049 130.302,69.811 ; R1.2 140.208,100.076 ; R2.2 139.986,106.902 140.716,106.172 140.716,100.584 140.208,100.076 ; C5.1@140.79,66.333 v2@140.79,69.268 ; v2(164.846,69.342) 164.846,78.486 165.735,79.375 U1.16 ; 130.302,69.811 140.394,69.811 v2(140.863,69.342) 140.863,99.421 140.208,100.076
  Bottom Layer w1: v2(140.863,69.342) v2(164.846,69.342)
NetB1_16: B1.16 H5.2 | length 10.3
  Top Layer w0.3: B1.16 105.644,68.6 H5.2
NetB1_17: B1.17 H5.1 | length 9.5
  Top Layer w0.3: B1.17 107.684,69.1 H5.1
NetB1_20: B1.20 C15.2 R18.1 | length 63.2
  Top Layer w0.3: R18.1 59.182,91.572 60.152,90.602 60.152,75.738 v1(63.5,72.39) ; v1(96.266,71.882) 97.548,70.6 B1.20
  Top Layer w0.5: C15.2 R18.1
  Bottom Layer w0.3: v1(63.5,72.39) 95.758,72.39 v1(96.266,71.882)
NetB1_21: B1.21 C17.2 R24.1 | length 94
  Top Layer w0.3: B1.21 102.596,71.1 v1(102.616,71.12)
  Top Layer w0.5: C17.2 v1(35.306,112.268) ; v1(49.53,113.284) R24.1
  Bottom Layer w0.3: v1(49.53,113.284) 50.546,112.268 64.008,112.268 103.632,72.644 103.632,72.136 v1(102.616,71.12)
  Bottom Layer w0.5: v1(35.306,112.268) 48.514,112.268 v1(49.53,113.284)
NetB1_22: B1.22 D5.1 R8.1 R9.1 | length 71.2
  Top Layer w0.3: v1(98.298,71.628) 99.086,71.628 99.114,71.6 99.321,71.6 B1.22
  Top Layer w1: R8.1 45.974,48.553 46.267,48.26 47.498,48.26 ; D5.1 47.498,45.843 47.498,48.26 ; v2(51.308,54.61) 49.022,52.324 R9.1 49.022,48.553 48.729,48.26 47.498,48.26
  Bottom Layer w0.5: 62.738,66.04 91.649,66.04 94.434,68.824 95.494,68.824 v1(98.298,71.628)
  Bottom Layer w1: v2(51.308,54.61) 62.738,66.04
NetB1_23: B1.23 H2.1 | length 9.6
  Top Layer w0.3: B1.23 101.31,72.1 102.87,73.66 H2.1
NetB1_24: B1.24 H2.2 | length 10.9
  Top Layer w0.3: B1.24 99.778,72.6 103.378,76.2 H2.2
NetB1_25: B1.25 H2.3 | length 12.7
  Top Layer w0.3: B1.25 98.508,74.676 102.572,78.74 H2.3
NetB1_26: B1.26 H2.4 | length 14.5
  Top Layer w0.3: B1.26 98.008,74.97 104.318,81.28 H2.4
NetB1_27: B1.27 H2.5 | length 16.1
  Top Layer w0.3: B1.27 97.508,75.178 106.15,83.82 H2.5
NetB1_28: B1.28 C6.2 L1.1 | length 24.4
  Top Layer w0.3: L1.1 81.312,73.594 82.264,74.546 C6.2 ; B1.28 97.008,75.385 97.79,76.167 v1(97.79,76.454)
  Bottom Layer w0.3: v1(82.296,76.708) 89.337,76.708 89.845,77.216 96.947,77.216 97.709,76.454 v1(97.79,76.454)
NetB1_30: B1.30 R11.1 | length 62.6
  Top Layer w0.3: B1.30 96.008,75.958 96.091,76.04 v1(96.091,76.121)
  Top Layer w0.5: R11.1 64.008,64.262 65.532,65.786 65.532,76.25 v1(67.31,78.028)
  Bottom Layer w0.3: v1(67.31,78.028) 69.546,78.028 70.104,77.47 77.47,77.47 79.252,75.688 95.5,75.688 95.876,76.064 96.033,76.064 v1(96.091,76.121)
NetB1_31: B1.31 H3.1 | length 23.6
  Top Layer w0.3: B1.31 95.508,75.358 95.508,75.385 95.358,75.535 95.358,76.308 104.14,85.09 H3.1
NetB1_32: B1.32 H3.2 | length 22.7
  Top Layer w0.3: B1.32 95.008,75.178 94.858,75.328 94.858,76.57 101.6,83.312 H3.2
NetB1_33: B1.33 H3.3 | length 23.2
  Top Layer w0.3: B1.33 94.508,74.97 94.358,75.12 94.358,76.832 100.584,83.058 100.584,89.662 99.06,91.186 H3.3
NetB1_34: B1.34 H6.2 | length 30.7
  Top Layer w0.3: B1.34 94.008,73.206 97.364,69.85 v1(98.298,69.85)
  Bottom Layer w0.3: v1(98.298,69.85) 97.536,69.088 97.536,67.056 96.266,65.786 96.266,63.246 103.886,55.626 106.934,55.626 H6.2
NetB1_35: B1.35 H6.3 | length 29.3
  Top Layer w0.3: B1.35 93.508,72.998 97.869,68.637 98.241,68.637 v1(98.298,68.58)
  Bottom Layer w0.3: v1(98.298,68.58) 98.298,68.508 98.552,68.254 98.552,66.47 98.376,66.294 97.536,66.294 96.898,65.656 96.898,63.376 104.14,56.134 H6.3
NetB1_38: B1.38 H7.1 | length 26.3
  Top Layer w0.3: B1.38 92.61,72.1 96.729,67.98 96.729,67.609 v1(96.774,67.564)
  Bottom Layer w0.3: v1(96.774,67.564) 95.758,66.548 95.758,62.992 98.552,60.198 H7.1
NetB1_39: B1.39 H7.4 | length 27.4
  Top Layer w0.3: B1.39 92.402,71.6 92.608,71.395 92.608,71.223 95.504,68.326 v1(95.504,67.564) ; v1(97.79,52.396) 97.79,52.315 97.504,52.028 97.504,49.08 H7.4
  Bottom Layer w0.3: v1(95.504,67.564) 95.447,67.507 95.447,66.944 95.258,66.755 95.258,62.73 97.79,60.198 v1(97.79,52.396)
NetB1_40: B1.40 C10.2 D1.1 | length 18
  Top Layer w0.3: C10.2 80.264,64.516 79.959,64.821 D1.1 80.01,67.361 80.01,68.072 80.43,68.492 85.51,68.492 88.138,71.12 90.618,71.12 90.638,71.1 B1.40
NetB1_41: B1.41 H7.5 | length 28.6
  Top Layer w0.3: B1.41 92.468,70.6 94.604,68.464 94.604,67.761 94.234,67.391 v1(94.234,67.31) ; v1(97.028,54.356) 99.06,54.356 99.822,53.594 99.822,49.276 H7.5
  Bottom Layer w0.3: v1(94.234,67.31) 94.234,62.992 97.028,60.198 v1(97.028,54.356)
NetB1_44: B1.44 H1.1 | length 25.4
  Top Layer w0.3: v1(89.408,66.8) 89.408,52.578 H1.1 ; v1(89.408,69.342) 89.916,69.342 90.158,69.1 B1.44
  Bottom Layer w0.3: v1(89.408,66.8) v1(89.408,69.342)
NetB1_45: B1.45 H1.2 | length 25.4
  Top Layer w0.3: v1(88.138,66.802) 88.138,51.308 H1.2 ; v1(88.344,68.709) 89.134,68.709 89.244,68.6 B1.45
  Bottom Layer w0.3: v1(88.138,66.802) 88.138,68.423 88.344,68.628 v1(88.344,68.709)
NetB1_46: B1.46 J2.4 R5.1 | length 48.9
  Top Layer w0.3: R5.1 v1(84.328,57.15) 84.328,60.198 84.924,60.794 84.924,65.214 87.662,67.952 88.506,67.952 88.654,68.1 B1.46
  Bottom Layer w0.3: v1(84.328,57.15) 84.328,41.148 90.932,34.544 90.932,30.988 J2.4
NetB1_47: B1.47 J2.2 R4.1 | length 49.4
  Top Layer w0.3: R4.1 v1(85.09,51.816) 85.09,60.198 85.424,60.532 85.424,65.007 87.869,67.452 88.713,67.452 88.861,67.6 B1.47
  Bottom Layer w0.3: v1(85.09,51.816) 85.09,41.656 93.472,33.274 93.472,30.988 J2.2
NetB1_48: B1.48 J2.3 | length 37.9
  Top Layer w0.3: B1.48 91.52,55.546 95.504,51.562 95.504,45.72 v1(92.202,42.418) ; J2.3 v1(92.202,38.1)
  Bottom Layer w0.3: v1(92.202,38.1) v1(92.202,42.418)
NetB2_1: B2.1 C11.1 D3.4 | length 60.4
  Top Layer w1: C11.1 70.984,70.695 70.984,50.936 B2.1
  Top Layer w2: D3.4 44.196,37.73 v4(44.196,40.386)
  Bottom Layer w1.8: 73.66,46.228 B2.1
  Bottom Layer w2: v4(44.196,40.386) 46.228,42.418 69.85,42.418 73.66,46.228
NetB3: B3.1 R16.1 R18.2 | length 28.7
  Top Layer w0.4: B3.1 57.363,108.402 57.912,108.951 v1(57.912,108.966)
  Top Layer w0.5: R16.1 R18.2 v1(62.738,91.694)
  Bottom Layer w0.5: v1(57.912,108.966) 60.208,106.67 60.462,106.67 62.738,104.394 v1(62.738,91.694)
NetB3_7: B3.7 R23.1 R24.2 | length 30
  Top Layer w0.4: R23.1@54.478,115.062 56.053,113.487 59.233,113.487 59.811,112.909 59.811,100.732 58.901,99.822 57.658,99.822 56.713,100.767 B3.7
  Top Layer w0.5: R24.2 51.086,117.062 53.086,115.062 R23.1 R23.1@54.478,115.062
NetB3_A+: B3.3 C14.2 R15.1 | length 42.8
  Top Layer w0.4: v1(55.626,109.982) 55.626,109.928 56.063,109.491 B3.3
  Top Layer w0.5: R15.1 44.196,91.694 v1(43.688,92.202) 43.688,92.175 43.18,91.667 43.18,84.836 44.196,83.82 46.736,83.82 47.466,84.55 C14.2
  Bottom Layer w0.5: v1(43.688,92.202) 53.848,102.362 53.848,109.637 54.193,109.982 v1(55.626,109.982)
NetB3_A-: B3.2 R16.2 R17.2 | length 32.3
  Top Layer w0.4: B3.2 56.713,109.545 v1(57.15,109.982)
  Top Layer w0.5: R17.2 v1(55.88,86.106) R16.2
  Bottom Layer w0.5: v1(55.88,86.106) 57.15,87.376 v1(57.15,109.982)
NetB3_B+: C16.2 R19.1 | length 11.3
  Top Layer w0.5: C16.2 34.798,107.188 37.084,104.902 R19.1 R19.1@36.784,99.074
NetB3_B-: B3.6 R22.2 R25.2 | length 30.4
  Top Layer w0.4: B3.6 56.063,100.401 57.658,98.806 58.928,98.806 60.452,100.33 60.452,113.03 61.976,114.554 61.976,117.062
  Top Layer w0.5: R22.2 61.976,117.062 R25.2
NetC1_1: C1.1 ENC1.B J1.5 R1.1 | length 83.6
  Top Layer w0.5: ENC1.B 128.501,87.607 129.032,88.138 v1(129.032,94.742) 132.207,94.742 132.842,95.377 C1.1 R1.1
  Bottom Layer w0.5: v1(129.032,94.742) 128.016,94.742 125.476,92.202 125.476,65.532 134.874,56.134 134.874,45.212 135.89,44.196 J1.5
NetC2_1: C2.1 ENC1.A J1.7 R2.1 | length 118.8
  Top Layer w0.5: C2.1 132.858,104.918 135.763,104.918 ; v1(135.89,102.616) 135.89,104.791 135.763,104.918 ; R2.1 138.668,104.918 135.763,104.918
  Bottom Layer w0.5: ENC1.A 128.095,77.47 126.238,79.327 126.238,89.662 127,90.424 132.08,90.424 135.89,94.234 v1(135.89,102.616) 134.62,101.346 128.524,101.346 123.952,96.774 123.952,62.992 130.556,56.388 130.556,50.038 132.588,48.006 132.588,42.672 133.604,41.656 J1.7
NetC3_1: C3.1 ENC1.1 J1.3 R3.1 | length 147.9
  Top Layer w0.5: J1.3 132.588,46.736 129.54,49.784 129.54,56.134 123.19,62.484 123.19,97.79 128.016,102.616 128.016,113.03 130.302,115.316 140.716,115.316 141.986,114.046 v1(141.986,109.22) 133.858,109.22 132.842,110.236 C3.1 R3.1
  Bottom Layer w0.5: v1(141.986,109.22) 141.986,97.282 144.78,94.488 144.78,79.248 ENC1.1
NetC10_1: C10.1 H7.3 | length 28.4
  Top Layer w0.3: v1(82.264,61.5) C10.1
  Bottom Layer w0.3: v1(82.264,61.5) 83.28,61.5 95.613,49.167 102.584,49.167 H7.3
NetC11_2: C11.2 C12.2 D3.3 | length 75.7
  Top Layer w1: D3.3 49.286,37.57 49.686,37.17 D3.3@49.836,37.17
  Top Layer w2: D3.3@49.836,37.17 54.24,32.766 58.166,32.766 59.69,34.29 59.69,40.308 60.53,41.148 63.5,41.148 67.31,44.958 67.31,72.644 70.866,76.2 74.304,76.2 ; C12.2 74.304,76.2 ; C11.2 77.689,72.815 74.304,76.2
NetC13_1: C13.1 D4.4 J7.1 R8.2 R13.2 T4.3 | length 162.4
  Top Layer w0.5: C13.1 62.992,68.58 64.77,70.358 64.77,96.774 67.818,99.822 84.582,99.822 85.667,100.907 85.79,100.907 86.106,101.224 R13.2 86.106,105.156 83.886,107.376 83.886,109.689 83.593,109.982 82.331,109.982 82.073,109.724 81.838,109.724 81.788,109.674 T4.3
  Top Layer w2: R8.2 43.974,57.69 50.403,64.119 ; D4.4 57.14,41.412 53.848,44.704 53.848,60.674 50.403,64.119 ; C13.1 54.864,68.58 50.403,64.119
  Bottom Layer w1: J7.1 36.548,89.69 57.658,68.58 C13.1
NetD3_1: D3.1 J3.2 RT424005F.11 | length 58.1
  Top Layer w2: RT424005F.11 40.64,73.876 40.64,29.972 ; J3.2 37.31,30.265 37.603,29.972 40.64,29.972 ; D3.1 42.534,29.972 40.64,29.972
NetD3_2: D3.2 D4.1 J3.1 RT424005F.21 | length 79.9
  Top Layer w2: RT424005F.21 26.162,74.13 26.162,39.352 J3.1 33.81,27.658 36.068,25.4 46.316,25.4 49.236,28.32 D3.2 D4.1
NetD4_2: D4.2 J4.1 RT424005F.22 | length 82.3
  Top Layer w2: D4.2 66.24,28.32 J4.1
  Bottom Layer w2: RT424005F.22 29.524,61.647 31.75,59.421 31.75,41.148 41.448,31.45 J4.1
NetD6_2: D6.2 RT424005F.A2 T1.3 | length 43.1
  Top Layer w0.5: RT424005F.A2 29.524,56.786 28.504,55.766 D6.2 28.504,47.696 29.21,46.99 37.338,46.99 v1(38.1,47.752) ; v1(55.88,47.498) 57.912,45.466 58.674,45.466 59.016,45.808 59.016,46.668 T1.3
  Bottom Layer w0.5: v1(38.1,47.752) 55.599,47.752 55.853,47.498 v1(55.88,47.498)
NetJ1_2: J1.2 U1.18 | length 55.9
  Top Layer w0.5: J1.2 158.75,49.276 162.814,53.34 162.814,79.248 165.481,81.915 U1.18
NetJ1_4: J1.4 U1.17 | length 56.7
  Top Layer w0.5: J1.4 157.734,46.736 163.749,52.751 163.749,79.167 165.227,80.645 U1.17
NetJ4_2: J4.2 RT424005F.12 RT424005F.24 | length 88.1
  Bottom Layer w2: RT424005F.24 33.02,79.036 33.02,74.422 34.99,72.452 RT424005F.12 37.024,61.916 34.544,59.436 34.544,43.688 44.196,34.036 71.12,34.036 72.87,32.286 J4.2
NetJ5_1: J5.1 L2.1 | length 8.2
  Bottom Layer w1: J5.1 81.072,120.696 81.788,121.412 L2.1
NetJ5_2: J5.2 L2.4 | length 21.6
  Bottom Layer w0.5: L2.4 L2.4@93.472,121.792
  Bottom Layer w1: J5.2 77.706,123.952 91.312,123.952 L2.4@93.472,121.792
NetJ6_2: B3.5 J6.2 R15.2 R19.2 R20.1 R21.2 | length 95.7
  Top Layer w0.4: v1(44.958,95.758) 46.99,97.79 46.99,99.822 54.356,99.822 55.413,100.879 B3.5
  Top Layer w0.5: R21.2 34.544,101.854 35.306,101.092 35.306,97.282 35.814,96.774 R19.2 38.608,96.774 41.656,99.822 46.99,99.822 ; v1(42.672,115.062) R20.1 ; v1(44.958,95.758) 47.498,93.218 R15.2
  Bottom Layer w0.5: v1(42.672,115.062) 42.653,115.081 42.201,115.081 J6.2 33.782,120.65 29.464,116.332 29.464,95.543 29.757,95.25 44.196,95.25 44.685,95.739 44.939,95.739 v1(44.958,95.758)
NetL2_2: L2.2 T3.3 | length 50.2
  Top Layer w1: L2.2 87.884,118.872 93.472,124.46 106.172,124.46 112.776,117.856 112.776,105.41 110.998,103.632 T3.3
NetR6_2: R6.2 R14.2 T6.1 | length 31.4
  Top Layer w0.5: v1(90.932,103.632) 92.034,104.734 93.284,104.734 ; T6.1 91.252,106.734 91.302,106.684 91.334,106.684 93.284,104.734 ; R14.2 95.234,102.785 93.284,104.734 ; v1(95.25,86.36) R6.2
  Bottom Layer w0.5: v1(90.932,103.632) 90.932,100.33 95.758,95.504 95.758,90.678 95.25,90.17 v1(95.25,86.36)
NetR10_1: R10.1 R11.2 T1.1 | length 33.3
  Top Layer w0.5: v1(42.164,44.958) R10.1 ; T1.1 60.066,48.493 61.807,46.752 R11.2 v1(64.008,44.45)
  Bottom Layer w0.5: v1(42.164,44.958) 42.164,46.228 42.672,46.736 54.864,46.736 57.15,44.45 v1(64.008,44.45)
NetR12_1: R12.2 T4.2 T5.3 | length 17.6
  Top Layer w0.5: R12.2 80.264,101.468 v1(82.738,103.942) T4.2 ; T5.3 v1(87.122,110.744)
  Bottom Layer w0.5: v1(82.738,103.942) 83.33,103.942 84.582,105.194 84.582,108.966 86.341,110.725 87.103,110.725 v1(87.122,110.744)
NetR12_2: R12.1 T3.1 | length 43.9
  Top Layer w1: R12.1 78.264,113.824 78.74,114.3 97.282,114.3 98.298,113.284 98.298,107.184 T3.1@101.6,103.882
NetR13_1: R13.1 T3.2 T4.1 T5.1 T6.3 | length 75.3
  Top Layer w0.5: T4.1@80.788,106.934 80.823,106.969 T4.1 ; 85.34,107.447 85.365,107.422 ; T5.1@86.072,107.422 86.172,107.322 T5.1 ; T5.1@86.147,106.954 87.183,105.918 88.403,105.918 ; R13.1 88.403,101.643 88.403,105.918 ; T6.3 90.209,109.439 89.916,109.146 89.916,106.211 89.623,105.918 88.403,105.918
  Top Layer w1: T4.1@80.788,106.934 79.795,106.934 79.502,107.227 79.502,112.444 80.088,113.03 84.836,113.03 ; 85.34,107.447 84.836,107.951 84.836,113.03 ; 85.365,107.422 T5.1@86.072,107.422 ; T3.2@104.648,113.792 104.648,103.632 104.648,101.385 104.355,101.092 100.584,101.092 97.028,104.648 97.028,112.444 96.442,113.03 84.836,113.03
NetR22_1: R22.1 R23.2 | length 5.9
  Top Layer w0.5: R23.2 55.912,117.062 57.912,115.062 R22.1
NetU1_2: U1.2 U2.6 | length 41
  Top Layer w0.5: U1.2 161.925,83.185 165.423,86.683 174.175,86.683 176.022,84.836 176.022,73.66 173.482,71.12 172.72,71.12 171.704,72.136 171.704,73.891 172.235,74.422 172.241,74.422 U2.6
NetU1_3: U1.3 U2.2@173.13,85.471 | length 16.6
  Top Layer w0.5: U1.3 161.925,81.915 165.481,85.471 U2.2@173.13,85.471
NetU1_4: U1.4 U2.4 | length 6.9
  Top Layer w0.5: U2.4 151.238,80.626 157.991,80.626 U1.4
NetU1_5: U1.5 U2.10 | length 8.5
  Top Layer w0.5: U2.10 155.223,79.375 U1.5
NetU1_6: U1.6 U2.11 | length 9.1
  Top Layer w0.5: U2.11 156.493,78.105 U1.6
NetU1_7: U1.7 U2.3@151.13,83.058 | length 31.1
  Top Layer w0.5: U2.3@151.13,83.058 148.844,80.772 148.844,71.374 150.368,69.85 152.146,69.85 153.924,71.628 159.219,71.628 159.61,72.019 159.61,76.394 159.188,76.816 158.029,76.816 U1.7
NetU1_8: U1.8 U2.5 | length 20.5
  Top Layer w0.5: v1(155.956,75.184) 155.983,75.184 156.345,75.546 157.991,75.546 U1.8
  Bottom Layer w0.5: v1(155.956,75.184) 163.194,75.184 163.223,75.155 170.434,75.155 U2.5
NetU1_9: U1.9 U2.9@151.159,77.851 | length 16.5
  Top Layer w0.5: U2.9@151.159,77.851 149.606,76.298 149.606,72.136 150.669,71.073 151.845,71.073 155.067,74.295 U1.9
NetU1_12: U1.12 U2.2@151.13,85.598 | length 36.7
  Top Layer w0.5: U1.12 168.871,74.295 169.164,74.002 169.164,71.628 168.421,70.885 167.405,70.885 v1(167.386,70.866)
  Bottom Layer w0.5: U2.2@151.13,85.598 154.432,85.598 154.94,85.09 154.94,71.882 155.956,70.866 v1(167.386,70.866)
NetU1_13: U1.13 U2.3@173.13,82.931 | length 13
  Top Layer w0.5: U1.13 168.783,75.565 172.397,79.179 174.136,79.179 174.498,79.541 174.498,81.563 U2.3@173.13,82.931
NetU1_14: U1.14 U2.9@173.13,80.391 | length 7.5
  Top Layer w0.5: U1.14 168.783,76.835 172.165,80.217 172.956,80.217 U2.9@173.13,80.391
NetU1_15: U1.15 U2.8 | length 23.2
  Top Layer w0.5: U1.15 167.96,78.105 170.096,80.241 170.096,82.212 172.027,84.143 173.921,84.143 175.198,82.866 175.198,74.839 U2.8
pads on no net: B1.4 B1.5 B1.6 B1.7 B1.8 B1.9 B1.12 B1.13 B1.18 B1.19 B1.36 B1.37 J1.6 J1.8 J1.9 J2.6 J2.8 RT424005F.14 U1.10 U1.11 U1.19 U1.20

## Other copper
Top Layer:
  text "PWM" at 40.64,126.492 h1.52 r180
  text "Thermokoppel" at 84.328,126.238 h1.52 r180
  text "12V Fan" at 24.384,96.266 h1.52 r270
  text "Soldering station 22-23" at 114.046,55.88 h1.52 r90
  text "Loic Schillings" at 114.046,32.512 h1.52 r90